# EAGLE board Toll_Controller_Unit_2nd_Iteration (EAGLE 9.6.2)
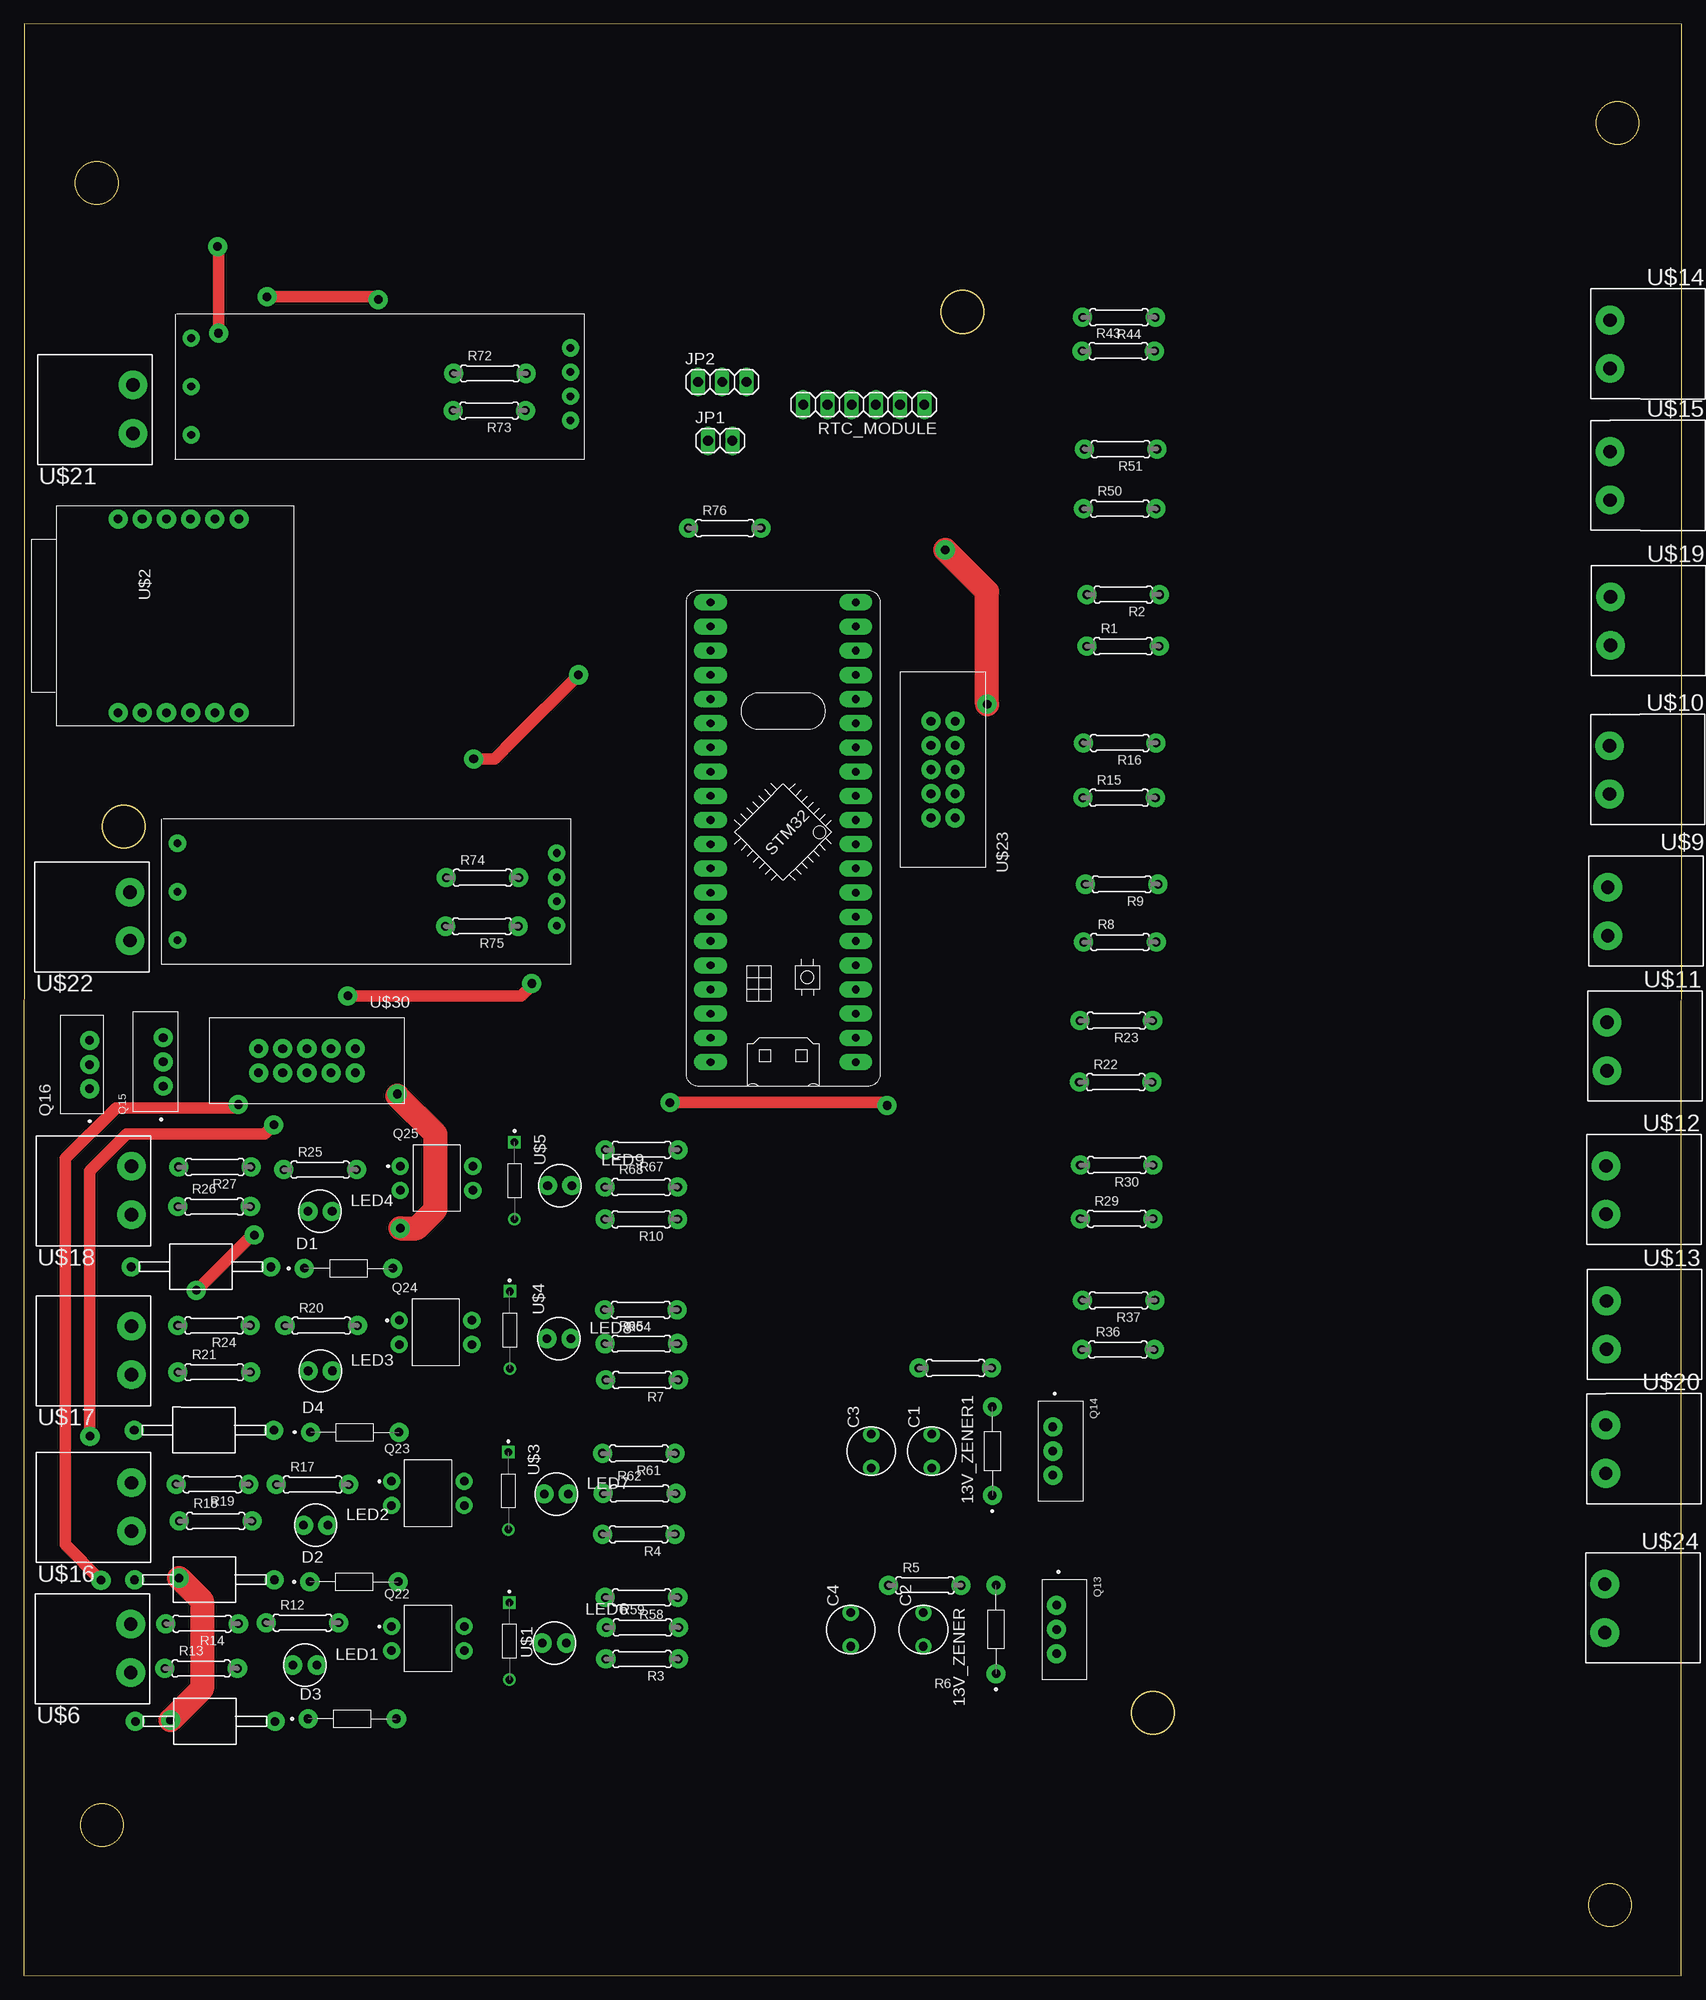
[diagram p0: board, top side]
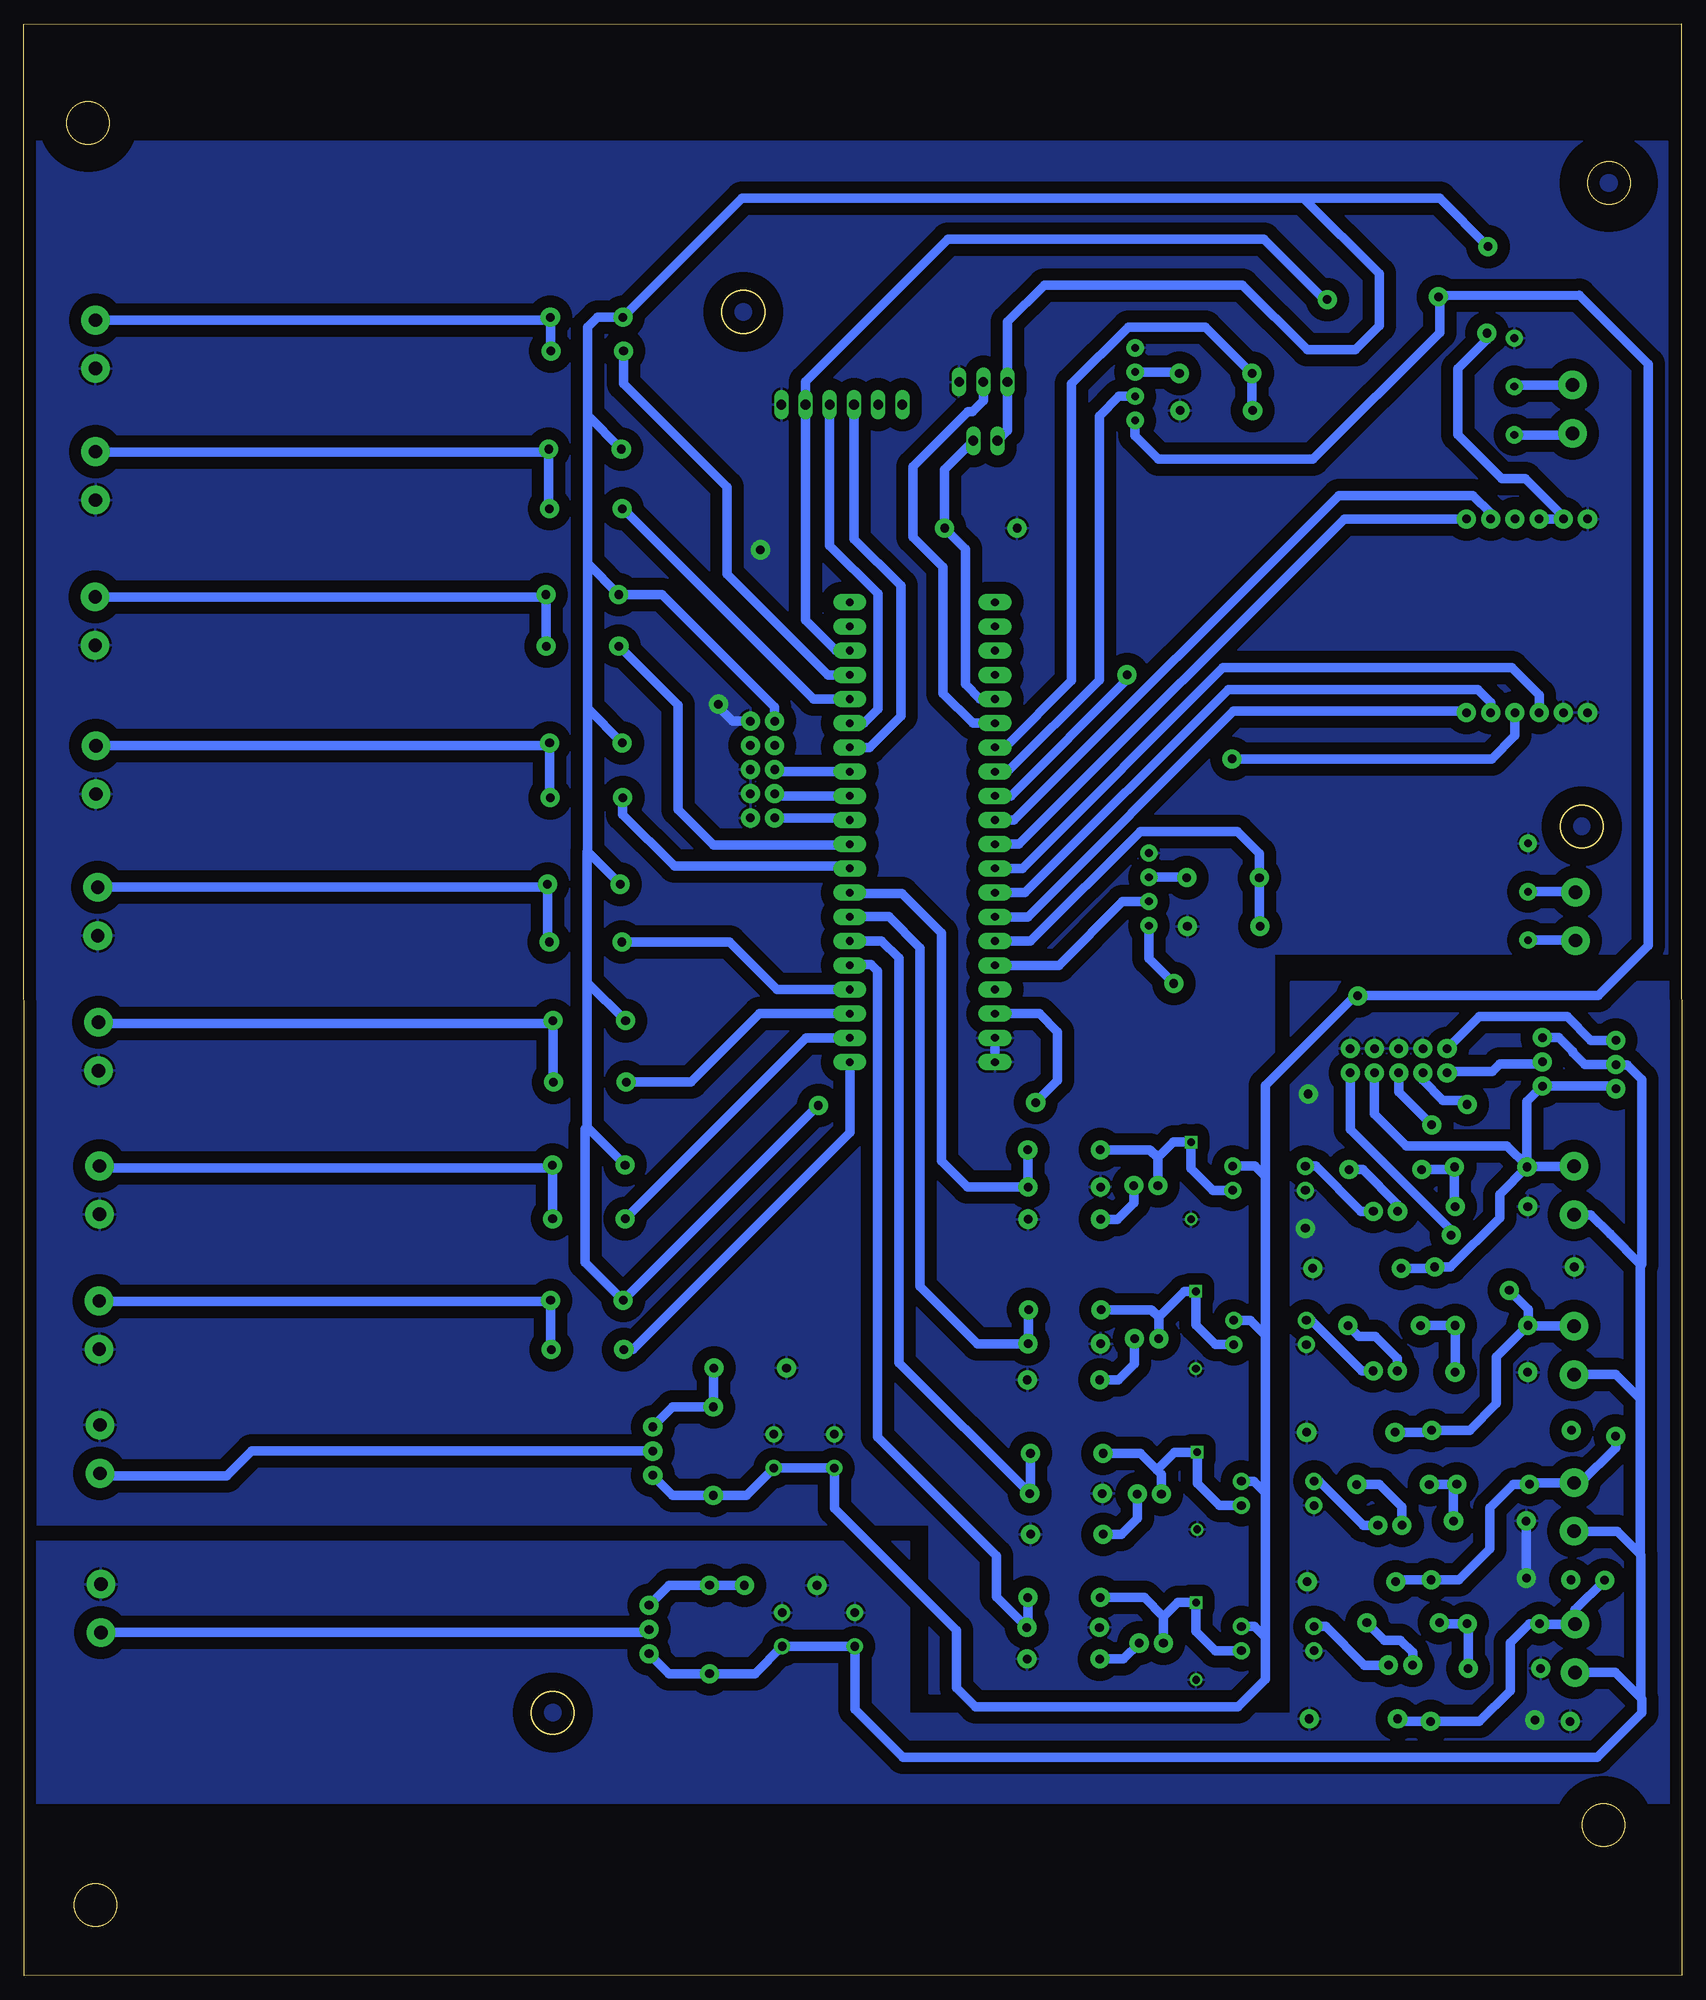
[diagram p1: board, bottom side, seen from below]

Size 173.99 x 204.83 mm. Coordinates in mm from the lower left corner, seen from the top.
Outline: 0,0.02 173.94,0 173.99,204.81 0.05,204.83 0,0.02
Outline: circle at 98.49,174.6 radius 2.24
Outline: circle at 118.49,27.6 radius 2.24
Outline: circle at 10.49,120.6 radius 2.24
Outline: circle at 8.21,15.79 radius 2.24
Outline: circle at 7.65,188.13 radius 2.24
Outline: circle at 167.24,194.43 radius 2.24
Outline: circle at 166.45,7.42 radius 2.24
Copper layers (1*16): Top 0.035mm / dielectric 1.5mm / Bottom 0.035mm
Design rules "default *": minimum track width 1mm, minimum drill 0.8mm, track to track 1mm, track to pad 0.5mm, pad to pad 0.5mm, via to via 0.5mm, smd to smd 6mil, copper to edge 40mil, drill to drill 6mil, minimum pad ring 10mil, minimum via ring 8mil, stop-mask expansion 4mil, vias tented up to drill 0mil, thermal gap 10mil
tRestrict: area 95.7,171.8 to 101.3,177.4; area 115.7,24.8 to 121.3,30.4; area 7.7,117.8 to 13.3,123.4; area 4.4,12 to 12,19.6; area 3.8,184.2 to 11.5,191.8; area 163.4,190.6 to 171.1,198.2; area 162.7,3.6 to 170.3,11.2
bRestrict: area 95.7,171.8 to 101.3,177.4; area 115.7,24.8 to 121.3,30.4; area 7.7,117.8 to 13.3,123.4; area 4.4,12 to 12,19.6; area 3.8,184.3 to 11.5,191.9; area 163.4,190.6 to 171,198.2; area 162.6,3.6 to 170.3,11.2

## Footprints (pad centres in the part's own frame; a part is rotated, then mirrored left to right if it is on the bottom)
DIOAD928W47L399D179 = drill 0.9 pad 2: A 4.64,0; C -4.64,0
CAPACITOR = drill 0.9 pad 1.7: 1 -1.77,0; 2 1.77,0
1X02 = drill 1.016 long: 1 -1.27,0; 2 1.27,0
1X03 = drill 1.016 long: 1 -2.54,0; 2 0,0; 3 2.54,0
LED = drill 0.9 pad 2: A -1.292,-0.049; K 1.248,-0.049
TO254P1052X465X1989-3 = drill 0.9 pad 2: 1 0,0; 2 2.54,0; 3 5.08,0
TO254P1054X469X1930-3 = drill 0.9 pad 2: 1 -2.54,-0.81; 2 0,-0.81; 3 2.54,-0.81
DIP762W50P254L650H455Q4B = drill 0.9 pad 1.8: 1 -3.81,1.27; 2 -3.81,-1.27; 3 3.81,-1.27; 4 3.81,1.27
RESISTOR = drill 0.9 pad 2: 1 -3.777,0.007; 2 3.843,0.007
1X06 = drill 1.016 long: 1 -6.35,0; 2 -3.81,0; 3 -1.27,0; 4 1.27,0; 5 3.81,0; 6 6.35,0
BLUE_PILL = drill 0.8 pad 1.75 long: P$1 -7.62,15.24; P$2 -7.62,12.7; P$3 -7.62,10.16; P$4 -7.62,7.62; P$5 -7.62,5.08; P$6 -7.62,2.54; P$7 -7.62,0; P$8 -7.62,-2.54; P$9 -7.62,-5.08; P$10 -7.62,-7.62; P$11 -7.62,-10.16; P$12 -7.62,-12.7; P$13 -7.62,-15.24; P$14 -7.62,-17.78; P$15 -7.62,-20.32; P$16 -7.62,-22.86; P$17 -7.62,-25.4; P$18 -7.62,-27.94; P$19 -7.62,-30.48; P$20 -7.62,-33.02; P$21 7.62,15.24; P$22 7.62,12.7; P$23 7.62,10.16; P$24 7.62,7.62; P$25 7.62,5.08; P$26 7.62,2.54; P$27 7.62,0; P$28 7.62,-2.54; P$29 7.62,-5.08; P$30 7.62,-7.62; P$31 7.62,-10.16; P$32 7.62,-12.7; P$33 7.62,-15.24; P$34 7.62,-17.78; P$35 7.62,-20.32; P$36 7.62,-22.86; P$37 7.62,-25.4; P$38 7.62,-27.94; P$39 7.62,-30.48; P$40 7.62,-33.02
1N227B = drill 0.8 pad 1.2: A 4.05,0 | drill 0.8 pad 1.2 square: C -4.05,0
W5500_MODULELITE = drill 0.9 pad 2: CS -10.09,-5.63; G -10.09,1.99; G1 -10.09,4.53; G2 10.23,4.53; INT -10.09,-8.17; MI 10.23,-8.17; MO -10.09,-0.55; NC 10.23,-3.09; RST 10.23,-5.63; SCK -10.09,-3.09; V 10.23,1.99; V1 10.23,-0.55
GREEN_PLUG_90_2 = drill 1.4 pad 3: 1 0,0; 2 0,-5.08
RS485_CHINESE = drill 0.8 pad 1.8: -- 41.3,2.54; A 41.3,12.7; B 41.3,7.62; GND 1.5,3.56; RXD 1.5,6.1; TXD 1.5,8.64; VCC 1.5,11.18
ICSP_10PIN_CUSTOM = drill 0.9 pad 2: 1 -5.08,-1.27; 2 -5.08,1.27; 3 -2.54,-1.27; 4 -2.54,1.27; 5 0,-1.27; 6 0,1.27; 7 2.54,-1.27; 8 2.54,1.27; 9 5.08,-1.27; 10 5.08,1.27
1KE100A_CUSTOM = drill 0.9 pad 2: 1 0.027,7.334; 2 0.027,-7.321

## Placement (x,y rotation side)
13V_ZENER  BZX55C3V3  [DIOAD928W47L399D179]  102.03,36.33 90 top
13V_ZENER1  BZX55C3V3  [DIOAD928W47L399D179]  101.63,55.05 90 top
C1  [CAPACITOR]  95.28,55.05 90 top
C2  [CAPACITOR]  94.41,36.33 90 top
C3  [CAPACITOR]  88.93,55.05 90 top
C4  [CAPACITOR]  86.79,36.33 90 top
D1  BZX55C3V3  [DIOAD928W47L399D179]  34.08,74.23 0 top
D2  BZX55C3V3  [DIOAD928W47L399D179]  34.66,41.33 0 top
D3  BZX55C3V3  [DIOAD928W47L399D179]  34.46,26.95 0 top
D4  BZX55C3V3  [DIOAD928W47L399D179]  34.72,57.03 0 top
JP1  [1X02]  73.08,161.08 0 top
JP2  [1X03]  73.3,167.25 0 top
LED1  [LED]  29.53,32.64 0 top
LED2  [LED]  30.65,47.32 0 top
LED3  [LED]  31.13,63.52 0 top
LED4  [LED]  31.11,80.27 0 top
LED6  [LED]  55.69,34.95 0 top
LED7  [LED]  55.9,50.59 0 top
LED8  [LED]  56.18,66.9 0 top
LED9  [LED]  56.26,82.96 0 top
Q13  IRF9540  [TO254P1052X465X1989-3]  108.38,38.87 270 top
Q14  IRF9540  [TO254P1052X465X1989-3]  107.98,57.59 270 top
Q15  IRF9540  [TO254P1052X465X1989-3]  14.63,93.36 90 top
Q16  IRF540N  [TO254P1054X469X1930-3]  6.1,95.61 90 top
Q22  PC817-B  [DIP762W50P254L650H455Q4B]  42.4,35.37 0 top
Q23  PC817-B  [DIP762W50P254L650H455Q4B]  42.4,50.61 0 top
Q24  PC817-B  [DIP762W50P254L650H455Q4B]  43.21,67.51 0 top
Q25  PC817-B  [DIP762W50P254L650H455Q4B]  43.31,83.68 0 top
R1  470  [RESISTOR]  115.32,139.52 0 top
R2  10k  [RESISTOR]  115.41,144.94 180 top
R3  470  [RESISTOR]  64.92,33.24 180 top
R4  470  [RESISTOR]  64.57,46.33 180 top
R5  1K  [RESISTOR]  94.52,40.96 0 top
R6  1K  [RESISTOR]  97.72,63.77 0 top
R7  470  [RESISTOR]  64.91,62.52 180 top
R8  470  [RESISTOR]  115,108.46 0 top
R9  10k  [RESISTOR]  115.25,114.54 180 top
R10  470  [RESISTOR]  64.83,79.39 180 top
R12  1k  [RESISTOR]  29.21,37.04 0 top
R13  10k  [RESISTOR]  18.57,32.23 0 top
R14  470  [RESISTOR]  18.74,36.95 180 top
R15  470  [RESISTOR]  114.91,123.61 0 top
R16  10k  [RESISTOR]  115.04,129.37 180 top
R17  1k  [RESISTOR]  30.26,51.54 0 top
R18  10k  [RESISTOR]  20.1,47.71 0 top
R19  470  [RESISTOR]  19.83,51.59 180 top
R20  1k  [RESISTOR]  31.18,68.21 0 top
R21  10k  [RESISTOR]  19.94,63.33 0 top
R22  470  [RESISTOR]  114.56,93.76 0 top
R23  10k  [RESISTOR]  114.69,100.23 180 top
R24  470  [RESISTOR]  19.99,68.24 180 top
R25  1k  [RESISTOR]  31.06,84.58 0 top
R26  10k  [RESISTOR]  19.94,80.7 0 top
R27  470  [RESISTOR]  20.08,84.87 180 top
R29  470  [RESISTOR]  114.66,79.43 0 top
R30  10k  [RESISTOR]  114.73,85.08 180 top
R36  470  [RESISTOR]  114.8,65.7 0 top
R37  10k  [RESISTOR]  114.93,70.88 180 top
R43  470  [RESISTOR]  114.83,170.49 0 top
R44  10k  [RESISTOR]  114.96,174.05 180 top
R50  470  [RESISTOR]  114.98,153.94 0 top
R51  10k  [RESISTOR]  115.13,160.2 180 top
R58  22k  [RESISTOR]  64.86,39.7 180 top
R59  33k  [RESISTOR]  64.89,36.54 0 top
R61  22k  [RESISTOR]  64.57,54.81 180 top
R62  33k  [RESISTOR]  64.59,50.58 0 top
R64  22k  [RESISTOR]  64.78,69.89 180 top
R65  33k  [RESISTOR]  64.76,66.32 0 top
R67  22k  [RESISTOR]  64.86,86.68 180 top
R68  33k  [RESISTOR]  64.76,82.75 0 top
R72  22k  [RESISTOR]  48.88,168.14 0 top
R73  33k  [RESISTOR]  48.88,164.26 180 top
R74  22k  [RESISTOR]  48.1,115.21 0 top
R75  33k  [RESISTOR]  48.1,110.13 180 top
R76  [RESISTOR]  73.52,151.9 0 top
RTC_MODULE  [1X06]  88.15,164.86 180 top
STM_BLUEPILL  [BLUE_PILL]  79.69,111.11 180 top
U$1  1N227B  [1N227B]  50.96,35.1 270 top
U$2  W5500_MODULELITE  [W5500_MODULELITE]  14.42,142.64 90 top
U$3  1N227B  [1N227B]  50.85,50.88 270 top
U$4  1N227B  [1N227B]  50.99,67.76 270 top
U$5  1N227B  [1N227B]  51.5,83.43 270 top
U$6  GREEN_PLUG_90_2  [GREEN_PLUG_90_2]  11.21,36.89 0 top
U$7  RS485_CHINESE  [RS485_CHINESE]  57.42,121.37 180 top
U$8  RS485_CHINESE  [RS485_CHINESE]  58.87,174.39 180 top
U$9  GREEN_PLUG_90_2  [GREEN_PLUG_90_2]  166.23,109.15 180 top
U$10  GREEN_PLUG_90_2  [GREEN_PLUG_90_2]  166.43,124 180 top
U$11  GREEN_PLUG_90_2  [GREEN_PLUG_90_2]  166.15,94.97 180 top
U$12  GREEN_PLUG_90_2  [GREEN_PLUG_90_2]  166.05,79.9 180 top
U$13  GREEN_PLUG_90_2  [GREEN_PLUG_90_2]  166.09,65.73 180 top
U$14  GREEN_PLUG_90_2  [GREEN_PLUG_90_2]  166.47,168.65 180 top
U$15  GREEN_PLUG_90_2  [GREEN_PLUG_90_2]  166.46,154.85 180 top
U$16  GREEN_PLUG_90_2  [GREEN_PLUG_90_2]  11.31,51.72 0 top
U$17  GREEN_PLUG_90_2  [GREEN_PLUG_90_2]  11.31,68.17 0 top
U$18  GREEN_PLUG_90_2  [GREEN_PLUG_90_2]  11.3,84.93 0 top
U$19  GREEN_PLUG_90_2  [GREEN_PLUG_90_2]  166.5,139.61 180 top
U$20  GREEN_PLUG_90_2  [GREEN_PLUG_90_2]  166.01,52.71 180 top
U$21  GREEN_PLUG_90_2  [GREEN_PLUG_90_2]  11.45,166.92 0 top
U$22  GREEN_PLUG_90_2  [GREEN_PLUG_90_2]  11.15,113.7 0 top
U$23  ICSP_10PIN_CUSTOM  [ICSP_10PIN_CUSTOM]  96.47,126.57 90 top
U$24  GREEN_PLUG_90_2  [GREEN_PLUG_90_2]  165.91,36 180 top
U$25  1KE100A_CUSTOM  [1KE100A_CUSTOM]  19.03,26.7 270 top
U$26  1KE100A_CUSTOM  [1KE100A_CUSTOM]  18.59,74.4 270 top
U$27  1KE100A_CUSTOM  [1KE100A_CUSTOM]  18.9,57.26 270 top
U$28  1KE100A_CUSTOM  [1KE100A_CUSTOM]  18.95,41.56 270 top
U$30  ICSP_10PIN_CUSTOM  [ICSP_10PIN_CUSTOM]  29.71,96.01 180 top

## Library data of the parts
13V_ZENER 13V_ZENER1 D1-D4 = BZX55C3V3; AVAILABILITY: In Stock; CHECK_PRICES: https://www.snapeda.com/parts/BZX55C3V3-TR/Vishay/view-part/?ref=eda; DESCRIPTION: Zener Diode 3.3 V 500 mW ±6% Through Hole DO-204AH (DO-35); MF: Vishay Semiconductor; MP: BZX55C3V3-TR; PACKAGE: DO-35 NXP Semiconductors; PRICE: None; SNAPEDA_LINK: https://www.snapeda.com/parts/BZX55C3V3-TR/Vishay/view-part/?ref=snap
C1-C4 LED1-LED4 LED6-LED9 R1-R10 R12-R27 R29 R30 R36 R37 R43 R44 R50 R51 R58 R59 R61 R62 R64 R65 R67 R68 R72-R76 = Hand_Solder
JP1 JP2 RTC_MODULE = pinhead
Q13-Q15 = IRF9540; AVAILABILITY: In Stock; CHECK_PRICES: https://www.snapeda.com/parts/IRF9540/Vishay/view-part/?ref=eda; DESCRIPTION: P-Channel 100 V 19A (Tc) 3.7W (Ta), 150W (Tc) Surface Mount D²PAK (TO-263); MF: Vishay Siliconix; MP: IRF9540; PACKAGE: TO-220-3 Vishay; PRICE: None; SNAPEDA_LINK: https://www.snapeda.com/parts/IRF9540/Vishay/view-part/?ref=snap
Q16 = IRF540N; AVAILABILITY: In Stock; CHECK_PRICES: https://www.snapeda.com/parts/IRF540N/Infineon/view-part/?ref=eda; DESCRIPTION: Transistor NPN MOS IRF540/IRF540N INTERNATIONAL RECTIFIER Ampere=28 V=100 TO220; MF: Infineon Technologies; MP: IRF540N; PACKAGE: Package; PRICE: None; SNAPEDA_LINK: https://www.snapeda.com/parts/IRF540N/Infineon/view-part/?ref=snap
Q22-Q25 = PC817-B; AVAILABILITY: Not in stock; CHECK_PRICES: https://www.snapeda.com/parts/PC817-B/American+Bright/view-part/?ref=eda; DESCRIPTION: Phototransistors 4-DIP (0.300, 7.62mm); MF: American Bright; MP: PC817-B; PACKAGE: DIP-4 American Bright; PRICE: None; SNAPEDA_LINK: https://www.snapeda.com/parts/PC817-B/American+Bright/view-part/?ref=snap
STM_BLUEPILL = BluePill
U$1 U$3-U$5 = 1N5227B
U$2 = W5500_ModuleLite
U$6 U$9-U$22 U$24 = Green_plug_90
U$7 U$8 = RS485_MOD
U$23 U$30 = ISCP_10PIN_CUSTOM
U$25-U$28 = 1KE100A_CUSTOM

## Nets
3V3: JP1.1 JP2.1 R2.2 R9.2 R16.2 R23.2 R30.2 R37.2 R44.2 R51.2 STM_BLUEPILL.P$23 U$2.V U$2.V1 U$23.10
5V: 13V_ZENER1.C C1.1 C3.1 Q14.3 Q22.4 Q23.4 Q24.4 Q25.4 RTC_MODULE.2 STM_BLUEPILL.P$18 U$7.VCC U$8.VCC
5V_PREP: Q14.2 U$20.1
12V: 13V_ZENER.C C2.1 C4.1 Q13.3 Q15.3 Q16.2 U$6.2 U$16.2 U$17.2 U$18.2
12V_PREP: Q13.2 U$24.1
32K: RTC_MODULE.6
BUZZER: JP2.2 STM_BLUEPILL.P$35
GND: C1.2 C3.2 JP2.3 R3.1 R4.1 R6.1 R7.1 R10.1 R59.1 R62.1 R65.1 R68.1 R73.1 R75.1 R76.1 RTC_MODULE.1 STM_BLUEPILL.P$21 STM_BLUEPILL.P$22 U$1.A U$2.G U$2.G1 U$2.G2 U$3.A U$4.A U$5.A U$7.-- U$7.GND U$8.-- U$8.GND U$9.1 U$10.1 U$11.1 U$12.1 U$13.1 U$14.1 U$15.1 U$19.1 U$20.2 U$23.1 U$23.3 U$23.5 U$23.9
GND1: C2.2 C4.2 D1.A D2.A D3.A D4.A Q22.2 Q23.2 Q24.2 Q25.2 R5.1 R13.1 R18.1 R21.1 R26.1 U$24.2 U$25.2 U$26.2 U$30.1 U$30.3 U$30.5 U$30.7
GREEN_CONNECTOR_BOOM: R8.2 R9.1 U$9.2
GREEN_CONNECTOR_OVERHEAD_LIGHT: R22.2 R23.1 U$11.2
GREEN_CONNECTOR_PC_SHUTDOWN: R36.2 R37.1 U$13.2
GREEN_CONNECTOR_SIREN: R15.2 R16.1 U$10.2
GREEN_CONNECTOR_SPARE_RELAY1: R43.2 R44.1 U$14.2
GREEN_CONNECTOR_SPARE_RELAY2: R50.2 R51.1 U$15.2
GREEN_CONNECTOR_SPARE_RELAY3: R1.2 R2.1 U$19.2
GREEN_LANE_OPERATION_LIGHT: R29.2 R30.1 U$12.2
IN_UART2_RX: R72.2 U$8.RXD
IN_UART3_RX: R74.2 U$7.RXD
INPUT_IR: D4.C R24.2 U$17.1 U$27.1 U$30.2
INPUT_L1: D3.C R14.2 U$6.1 U$25.1 U$30.8
INPUT_L2: D2.C R19.2 U$16.1 U$28.1 U$30.6
LANE_OPERATION_LIGHT: R29.1 STM_BLUEPILL.P$2
LED_CAMERA: STM_BLUEPILL.P$11 U$23.2
LED_IR: LED8.A Q24.3 R64.2 U$4.C
LED_L1: LED6.A Q22.3 R58.2 U$1.C
LED_L2: LED7.A Q23.3 R61.2 U$3.C
LED_PAYMENT: STM_BLUEPILL.P$12 U$23.4
LED_PING: STM_BLUEPILL.P$13 U$23.6
LED_SI1: LED9.A Q25.3 R67.2 U$5.C
N$2: 13V_ZENER1.A Q14.1 R6.2
N$3: 13V_ZENER.A Q13.1 R5.2
N$4: LED6.K R3.2
N$7: LED7.K R4.2
N$8: LED8.K R7.2
N$10: LED9.K R10.2
N$14: LED1.A R12.2
N$16: R12.1 R13.2 R14.1
N$18: LED2.A R17.2
N$20: R17.1 R18.2 R19.1
N$22: LED3.A R20.2
N$24: R20.1 R21.2 R24.1
N$25: R25.1 R26.2 R27.1
N$26: LED4.A R25.2
N$33: LED1.K Q22.1
N$34: LED3.K Q24.1
N$35: LED4.K Q25.1
N$36: LED2.K Q23.1
OVERHEAD_LIGHT: R22.1 STM_BLUEPILL.P$3
PC_SHUTDOWN: R36.1 STM_BLUEPILL.P$1
READ_IR: R64.1 R65.2 STM_BLUEPILL.P$7
READ_L1: R58.1 R59.2 STM_BLUEPILL.P$5
READ_L2: R61.1 R62.2 STM_BLUEPILL.P$6
RTC_SCL: RTC_MODULE.4 STM_BLUEPILL.P$14
RTC_SDA: RTC_MODULE.3 STM_BLUEPILL.P$15
SPARE_INPUT1: R67.1 R68.2 STM_BLUEPILL.P$8
SPARE_RELAY1: R43.1 STM_BLUEPILL.P$17
SPARE_RELAY2: R50.1 STM_BLUEPILL.P$16
SPARE_RELAY3: R1.1 STM_BLUEPILL.P$10
SQW: RTC_MODULE.5
STM_RESET: STM_BLUEPILL.P$24
TCU_BOX_OPEN: D1.C Q15.1 Q16.1 R27.2 U$18.1 U$26.1 U$30.4
TCU_BOX_OPEN_GREEN: Q16.3 U$30.9
TCU_BOX_OPEN_RED: Q15.2 U$30.10
TRIGGER_BOOM: R8.1 STM_BLUEPILL.P$4
TRIGGER_SIREN: R15.1 STM_BLUEPILL.P$9
UART2_A: U$8.A U$21.2
UART2_B: U$8.B U$21.1
UART2_RX: R72.1 R73.2 STM_BLUEPILL.P$34
UART2_TX: STM_BLUEPILL.P$33 U$8.TXD
UART3_A: U$7.A U$22.2
UART3_B: U$7.B U$22.1
UART3_RX: R74.1 R75.2 STM_BLUEPILL.P$26
UART3_TX: STM_BLUEPILL.P$25 U$7.TXD
UART-SPI_CS: JP1.2 R76.2 STM_BLUEPILL.P$36
W5500_CS: STM_BLUEPILL.P$28 U$2.CS
W5500_INT: STM_BLUEPILL.P$27 U$2.INT
W5500_MISO: STM_BLUEPILL.P$30 U$2.MI
W5500_MOSI: STM_BLUEPILL.P$29 U$2.MO
W5500_RST: STM_BLUEPILL.P$31 U$2.RST
W5500_SCK: STM_BLUEPILL.P$32 U$2.SCK

## Tracks (layer width: path | path; a pad name or v marks a point on that pad's centre or on a via)
3V3  (via drill 0.9 pad 2)
  Top 1.2: v90.6,91.32 90.3,91.62 v67.8,91.62 | v20.43,172.37 20.43,181.35 v20.33,181.45
  Bottom 1: JP1.1 70.76,162.14 JP2.1 70.76,173.57 66.9,177.42 46.1,177.42 39.3,170.62 34.27,170.62 31.76,173.13 31.76,178.58 39.7,186.52 | U$23.10 95.2,133.11 107.03,144.93 R2.2 114.85,148.21 | STM_BLUEPILL.P$23 67.4,100.95 65.5,99.05 65.5,93.92 v67.8,91.62 | R23.2 114.86,104.24 | 114.85,163.76 114.85,172.97 113.78,174.04 R44.2 98.63,186.52 39.7,186.52 | R51.2 114.85,163.76 | 114.85,148.21 114.85,163.76 | 114.85,133.02 114.85,148.21 | R16.2 114.85,133.02 | 114.85,133.02 114.85,117.98 | 114.85,117.98 R9.2 | 114.86,104.24 114.86,117.96 114.85,117.98 | 114.86,89.05 114.86,104.24 | R30.2 114.86,89.05 | 114.86,89.05 115.07,88.84 115.07,74.85 R37.2 90.63,91.32 v90.6,91.32 | v20.33,181.45 25.41,186.52 39.7,186.52 | v20.43,172.37 20.43,171.69 23.47,168.65 23.47,161.72 18.87,157.12 16.41,157.12 12.43,153.14 U$2.V U$2.V1
5V  (via drill 0.9 pad 2)
  Top 1.2: v53.3,104.12 53.4,104.02 52.2,102.82 v34,102.82 | v25.53,176.18 36.91,176.18 v37.2,175.89
  Bottom 1: STM_BLUEPILL.P$18 88.74,139.05 91.96,142.27 RTC_MODULE.2 91.96,167.26 76.99,182.23 43.84,182.23 37.5,175.89 v37.2,175.89 | Q14.3 105.88,50.41 13V_ZENER1.C 98.15,50.41 C1.1 C3.1 88.93,49.03 76.12,36.22 76.12,30.22 74.13,28.23 46.57,28.23 43.69,31.11 43.69,35.5 | 43.69,35.5 44.83,36.64 Q22.4 | Q23.4 44.92,51.88 43.69,50.65 | 43.69,35.5 43.69,50.65 | 43.69,50.65 43.69,67.2 | Q24.4 45.27,68.78 43.69,67.2 | 43.69,67.2 43.69,83.86 | Q25.4 44.78,84.95 43.69,83.86 | 43.69,83.86 43.69,93.43 34.29,102.82 v34,102.82 33.98,102.84 8.78,102.84 3.5,108.12 3.5,169.12 10.74,176.36 24.66,176.3 25.41,176.3 | U$8.VCC 57.37,161.59 54.9,159.12 38.69,159.12 25.41,172.41 25.41,176.3 | v53.3,104.12 55.92,106.75 U$7.VCC | 25.41,176.3 v25.53,176.18
5V_PREP
  Bottom 1: Q14.2 150.08,55.05 152.7,52.42 165.73,52.42 U$20.1
12V
  Bottom 1: Q13.3 106.28,31.69 13V_ZENER.C 97.28,31.69 C2.1 C4.1 86.79,27.97 81.72,22.9 8.89,22.9 4.2,27.59 4.2,29.03 4.31,29.14 | 4.34,74.64 4.34,60.52 | 4.34,60.52 4.34,44.21 | 4.31,29.14 4.31,44.18 4.34,44.21 | U$18.2 9.54,79.85 7.53,77.83 4.34,74.64 | 4.34,74.64 4.28,74.59 4.21,74.66 4.21,94.07 5.7,95.56 6.86,95.56 Q16.2 6.93,95.63 10.18,95.63 11.45,96.9 11.45,96.97 12.92,98.44 Q15.3 | U$17.2 6.9,63.09 4.34,60.52 | U$16.2 6.77,46.64 4.34,44.21 | U$6.2 6.98,31.81 4.31,29.14
12V_PREP
  Bottom 1: Q13.2 108.68,36.03 165.88,36.03 U$24.1
BUZZER
  Bottom 1: STM_BLUEPILL.P$35 74.39,131.43 77.52,134.56 77.52,147.8 80.67,150.96 80.67,158.36 74.9,164.13 74.45,164.13 73.3,165.29 JP2.2
GND  (via drill 0.9 pad 2)
  Top 2.5: v101.1,133.42 101.1,145.22 v96.7,149.62
  Bottom 1: STM_BLUEPILL.P$22 STM_BLUEPILL.P$21 | U$23.9 99.63,131.65 101,133.02 101,133.32 v101.1,133.42
  pour Bottom (isolate 1.27): 1.49,192.49 1.49,107.22 42.82,107.22 42.82,29.59 78.94,29.59 78.94,47.33 173.15,47.33 173.15,192.49
GND1  (via drill 0.9 pad 2)
  Top 1: 39.2,92.32 v39.2,92.52
  Top 2.5: v39.5,78.42 41.2,78.42 43.2,80.42 43.2,88.32 39.2,92.32 | v16.3,41.72 18.7,39.32 18.7,30.12 v15.4,26.82
  Bottom 1: R18.1 16.33,41.75 v16.3,41.72
  pour Bottom (isolate 1.27): 0.75,104.26 41.06,104.26 41.06,27.47 81.03,27.47 81.03,45.5 173.51,45.5 173.51,18.12 0.75,18.12
GREEN_CONNECTOR_BOOM
  Bottom 1: U$9.2 119.34,114.23 R9.1 119.03,108.66 R8.2
GREEN_CONNECTOR_OVERHEAD_LIGHT
  Bottom 1: R22.2 118.46,93.83 R23.1 118.76,99.92 166.03,99.92 U$11.2
GREEN_CONNECTOR_PC_SHUTDOWN
  Bottom 1: R36.2 118.71,65.77 R37.1 118.81,70.77 166.05,70.77 U$13.2
GREEN_CONNECTOR_SIREN
  Bottom 1: R15.2 118.81,123.68 R16.1 119.1,129.08 U$10.2
GREEN_CONNECTOR_SPARE_RELAY1
  Bottom 1: R43.2 118.73,170.56 R44.1 119.03,173.74 U$14.2
GREEN_CONNECTOR_SPARE_RELAY2
  Bottom 1: R50.2 118.91,154.03 R51.1 119.21,159.9 166.43,159.9 U$15.2
GREEN_CONNECTOR_SPARE_RELAY3
  Bottom 1: R1.2 119.19,139.55 R2.1 119.43,144.69 U$19.2
GREEN_LANE_OPERATION_LIGHT
  Bottom 1: R29.2 R30.1 118.81,84.77 165.85,84.77 U$12.2
IN_UART2_RX
  Bottom 1: R72.2 52.86,168.29 U$8.RXD
IN_UART3_RX
  Bottom 1: U$7.RXD 52,115.27 R74.2
INPUT_IR  (via drill 0.9 pad 2)
  Top 1.2: v24.19,77.71 24.07,77.84 18.15,71.92 v18.1,71.92
  Bottom 1: U$17.1 16.08,68.17 | 16.08,68.17 R24.2 19.43,64.95 19.43,60.03 22.24,57.23 U$27.1 26.44,57.03 D4.C | U$30.2 34.79,88.82 24.19,78.22 v24.19,77.71 | v18.1,71.92 16.08,69.9 16.08,68.17
INPUT_L1  (via drill 0.9 pad 2)
  Top 1.2: v22.51,91.42 22.17,91.08 9.69,91.08 4.34,85.74 4.34,45.26 v8.09,41.51
  Bottom 1: v8.09,41.51 11.21,38.39 U$6.1 14.85,36.89 R14.2 15.99,36.94 18.02,34.92 18.02,29.9 21.24,26.67 U$25.1 29.54,26.67 D3.C | U$30.8 27.17,93.97 25.05,91.86 22.95,91.86 v22.51,91.42
INPUT_L2  (via drill 0.9 pad 2)
  Top 1.2: v26.24,89.29 25.3,88.34 10.8,88.34 6.93,84.47 6.93,56.62 v6.94,56.61
  Bottom 1: v6.94,56.61 6.94,55.41 10.62,51.72 U$16.1 15.84,51.72 R19.2 17.65,51.58 20.15,49.09 20.15,44.8 23.41,41.54 U$28.1 29.82,41.54 D2.C | U$30.6 29.71,92.76 v26.24,89.29
LANE_OPERATION_LIGHT
  Bottom 1: STM_BLUEPILL.P$2 91.91,98.41 R29.1
LED_CAMERA
  Bottom 1: U$23.2 87.53,121.49 STM_BLUEPILL.P$11
LED_IR
  Bottom 1: R64.2 55.63,69.88 54.89,69.13 | 54.89,69.13 LED8.A | 54.89,69.13 52.21,71.81 U$4.C 50.99,68.27 48.95,66.24 Q24.3
LED_L1
  Bottom 1: R58.2 56.39,39.69 54.38,37.67 | 54.38,37.67 54.38,34.92 LED6.A | 54.38,37.67 52.89,39.15 U$1.C 50.96,36.14 48.92,34.1 Q22.3
LED_L2
  Bottom 1: R61.2 56.78,54.81 55.07,53.09 | LED7.A 54.6,52.63 55.07,53.09 | 55.07,53.09 53.23,54.93 U$3.C 50.85,51.65 48.54,49.34 Q23.3
LED_PAYMENT
  Bottom 1: U$23.4 94.98,123.81 STM_BLUEPILL.P$12
LED_PING
  Bottom 1: U$23.6 94.98,126.35 STM_BLUEPILL.P$13
LED_SI1
  Bottom 1: 54.97,85.85 LED9.A | 54.97,85.85 53.34,87.48 U$5.C 51.5,84.7 49.21,82.41 Q25.3 | R67.2 55.79,86.67 54.97,85.85
N$2
  Bottom 1: Q14.1 105.88,59.69 13V_ZENER1.A 101.63,63.71 R6.2
N$3
  Bottom 1: Q13.1 106.28,40.97 13V_ZENER.A 102.02,40.96 R5.2
N$4
  Bottom 1: LED6.K 58.6,33.23 R3.2
N$7
  Bottom 1: R4.2 58.79,46.32 57.14,47.97 LED7.K
N$8
  Bottom 1: R7.2 59.1,62.52 57.43,64.19 LED8.K
N$10
  Bottom 1: R10.2 59.23,79.38 57.51,81.11 LED9.K
N$14
  Bottom 1: R12.2 31.21,35.21 29.51,35.21 28.23,33.94 LED1.A
N$16
  Bottom 1: R12.1 25.32,36.94 R14.1 22.42,36.84 R13.2
N$18
  Bottom 1: R17.2 31.71,51.54 29.36,49.19 LED2.A
N$20
  Bottom 1: R17.1 23.64,51.54 R19.1 23.95,51.24 R18.2
N$22
  Bottom 1: R20.2 33.9,67.1 32.18,67.1 29.84,64.77 LED3.A
N$24
  Bottom 1: R20.1 27.39,68.24 R24.1 23.77,63.35 R21.2
N$25
  Bottom 1: R25.1 24.14,84.58 R27.1 23.85,80.79 R26.2
N$26
  Bottom 1: R25.2 33.49,84.58 29.82,80.92 LED4.A
N$33
  Bottom 1: Q22.1 37.33,36.64 33.28,32.59 LED1.K
N$34
  Bottom 1: Q24.1 38.89,68.78 33.58,63.47 LED3.K
N$35
  Bottom 1: Q25.1 38.39,84.95 33.66,80.22 LED4.K
N$36
  Bottom 1: LED2.K 33.41,47.27 38.02,51.88 Q23.1
OVERHEAD_LIGHT
  Bottom 1: R22.1 103.99,93.77 96.8,100.95 STM_BLUEPILL.P$3
PC_SHUTDOWN
  Bottom 1: STM_BLUEPILL.P$1 87.31,88.47 110.08,65.71 R36.1
READ_IR
  Bottom 1: STM_BLUEPILL.P$7 87.27,111.15 83.21,111.15 79.92,107.86 79.92,72.33 73.91,66.32 R65.2 68.55,66.37 R64.1
READ_L1
  Bottom 1: STM_BLUEPILL.P$5 87.25,106.09 85.07,106.09 84.4,105.41 84.4,56.53 71.93,44.07 71.93,39.75 R59.2 68.63,36.64 R58.1
READ_L2
  Bottom 1: STM_BLUEPILL.P$6 87.29,108.59 83.96,108.59 82.16,106.79 82.16,64.32 R62.2 68.35,50.67 R61.1
RTC_SCL
  Bottom 1: STM_BLUEPILL.P$14 85.26,128.89 81.96,132.19 81.96,145.86 86.88,150.78 RTC_MODULE.4
RTC_SDA
  Bottom 1: STM_BLUEPILL.P$15 85.83,131.43 84.35,132.91 84.35,145.02 89.42,150.08 RTC_MODULE.3
SPARE_INPUT1
  Bottom 1: STM_BLUEPILL.P$8 87.22,113.56 81.82,113.56 77.68,109.42 77.68,85.51 74.94,82.76 R68.2 68.64,82.79 R67.1
SPARE_RELAY1
  Bottom 1: R43.1 111.05,167.07 100.18,156.2 100.18,147.07 89.62,136.51 STM_BLUEPILL.P$17
SPARE_RELAY2
  Bottom 1: STM_BLUEPILL.P$16 91.12,133.97 111.1,153.95 R50.1
SPARE_RELAY3
  Bottom 1: R1.1 105.35,133.33 105.35,122.39 101.6,118.63 87.41,118.63 STM_BLUEPILL.P$10
TCU_BOX_OPEN
  Bottom 1: D1.C 26.07,74.23 U$26.1 24.27,74.38 19.12,79.53 19.12,81.99 R27.2 | U$30.4 32.25,90.41 28.92,87.09 18.34,87.09 16.17,84.93 | Q16.1 7.2,93.36 Q15.1 16.23,91.75 R27.2 | U$18.1 16.17,84.93 | 16.17,84.93 R27.2
TCU_BOX_OPEN_GREEN
  Bottom 1: U$30.9 21.27,100.64 12.01,100.64 9.53,98.15 Q16.3
TCU_BOX_OPEN_RED
  Bottom 1: U$30.10 24.49,94.88 19.88,94.88 19.07,95.7 14.83,95.7 Q15.2
TRIGGER_BOOM
  Bottom 1: STM_BLUEPILL.P$4 94.93,103.49 99.91,108.47 R8.1
TRIGGER_SIREN
  Bottom 1: R15.1 111.13,121.88 105.69,116.43 87.55,116.43 STM_BLUEPILL.P$9
UART2_A
  Bottom 1: U$8.A 11.61,161.69 U$21.2
UART2_B
  Bottom 1: U$21.1 17.41,166.92 U$8.B
UART2_RX
  Bottom 1: R73.2 45.1,164.31 R72.1 49.97,173.01 58.09,173.01 64.03,167.08 64.03,135.89 71.02,128.89 STM_BLUEPILL.P$34
UART2_TX
  Bottom 1: STM_BLUEPILL.P$33 72.03,126.39 70.69,126.39 61.13,135.96 61.13,163.68 59.06,165.75 U$8.TXD
UART3_A
  Bottom 1: U$7.A 11.19,108.67 U$22.2
UART3_B
  Bottom 1: U$7.B 11.19,113.75 U$22.1
UART3_RX
  Bottom 1: R75.2 44.32,110.19 R74.1 44.32,117.76 46.65,120.08 56.83,120.08 68.34,108.57 STM_BLUEPILL.P$26
UART3_TX
  Bottom 1: U$7.TXD 58.68,112.73 65.38,106.03 STM_BLUEPILL.P$25
UART-SPI_CS
  Bottom 1: STM_BLUEPILL.P$36 73.63,133.97 75.19,135.53 75.19,149.73 R76.2 77.37,158.07 JP1.2
W5500_CS
  Bottom 1: STM_BLUEPILL.P$28 68.91,113.65 47.59,134.98 21.41,134.98 20.05,133.62 U$2.CS
W5500_INT
  Bottom 1: STM_BLUEPILL.P$27 68.62,111.11 47.05,132.69 22.73,132.69 U$2.INT
W5500_MISO
  Bottom 1: U$2.MI 35.42,152.87 69.55,118.73 STM_BLUEPILL.P$30
W5500_MOSI
  Bottom 1: STM_BLUEPILL.P$29 69.2,116.19 48.13,137.26 17.83,137.26 14.97,134.39 U$2.MO
W5500_RST
  Bottom 1: STM_BLUEPILL.P$31 70.08,121.27 36.01,155.34 21.9,155.34 20.05,153.49 U$2.RST
W5500_SCK  (via drill 0.9 pad 2)
  Top 1.2: v58.21,136.51 51.46,129.76 49.39,127.69 v47.2,127.69
  Bottom 1: STM_BLUEPILL.P$32 70.41,123.81 58.21,136.01 v58.21,136.51 | v47.2,127.69 19.93,127.69 17.51,130.12 U$2.SCK

## Text on the board
tDocu: MADE IN BANGLADESH